# Altium PCB PCB_onduleur.PcbDoc
Units mil, origin at the board's own origin, x right, y up, seen from the top; angles counter-clockwise.
Board outline 4845 x 1010 mil, 2 copper layers (Top Layer, Bottom Layer); 14 components, 13 nets, 46 pads, 0 vias.
Unrouted connection lines stored in the file: 2.
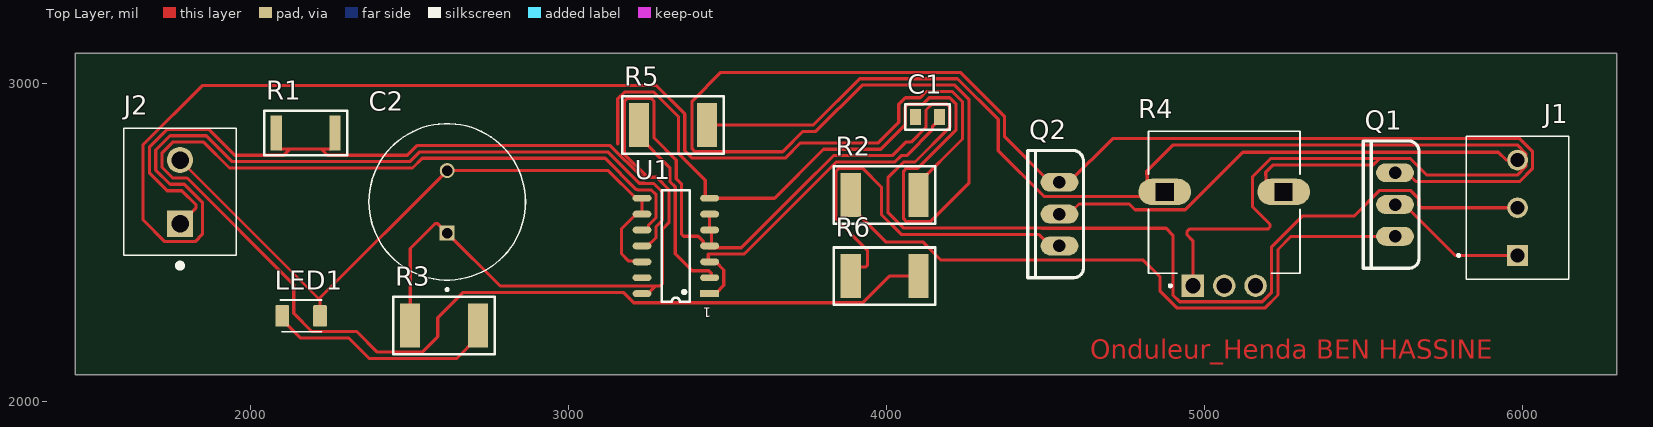
[diagram p0: Top Layer view]
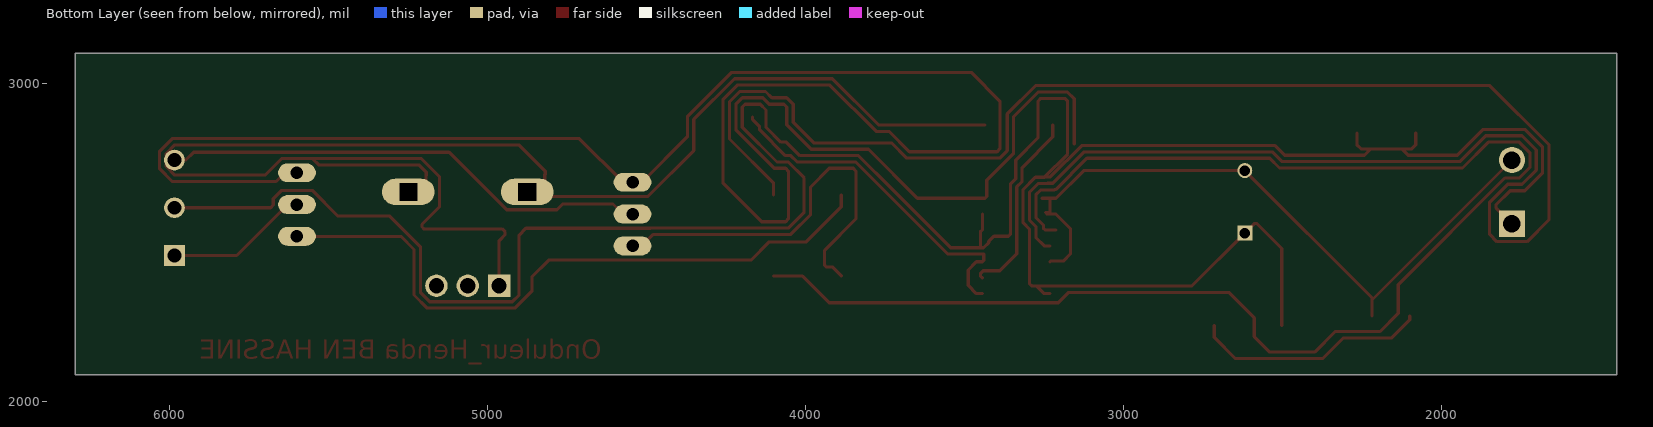
[diagram p1: Bottom Layer view, seen from below]
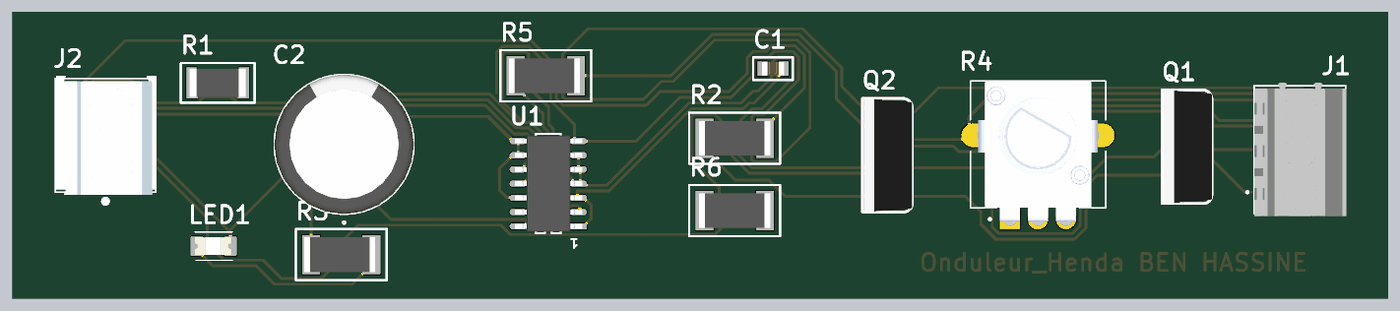
[diagram p2: 3D render of the assembled board from above, using the file's embedded part models]

## Layer stack, top to bottom
Top Solder: solder mask 0.4, Solder Resist, Dk 3.5
Top Layer: signal copper 1.4
Dielectric 1: dielectric 12.6, FR-4, Dk 4.8
Bottom Layer: signal copper 1.4
Bottom Solder: solder mask 0.4, Solder Resist, Dk 3.5

## Board outline
1450,2085 6295,2085 6295,3095 1450,3095

## Design rules (kind name [scope] priority, off if disabled: settings)
Clearance [All] p1: gap=10 ignorepadtopadclearanceinfootprint=FALSE except(0: Arc-Hole Track-Hole SMDPad-Hole THPad-Hole Via-Hole Fill-Hole Poly-Hole Region-Hole Text-Hole)
PolygonConnect [All] p1: connectstyle=Relief reliefconductorwidth=10 reliefentries=4 polygonreliefangle="90 Angle" airgapwidth=10
RoutingVias [All] p1: holewidth=28 width=50 viastyle="Through Hole" minholewidth=28 minwidth=50 maxholewidth=28 maxwidth=50
SolderMaskExpansion [All] p1: expansion=4 istentingtop=FALSE
Width [All] p1: maxlimit=10 minlimit=10 preferedwidth=10
30 further rules are at their usual default settings.

## Components (designator, comment, footprint, x,y, rotation, side; value= is the part's Value field where it differs from the comment)
C1 "Cap 10nF" "C0805 10nf" 4128.7,2895 r0 top
C2 "1000uf Cap" "Cap 1000uf" 2618.7,2628.43 r90 top
J1 "HDR 3" "HDR 3" 5983.7,2460 r90 top
J2 "HDR 2" "HDR 2" 1778.7,2560 r90 top
LED1 "LED SMD" LED 2159.25,2270 r180 top
Q1 "IRFZ44NPBF" IRF 5598.7,2620 r90 top
Q2 "IRFZ44NPBF" IRF 4543.7,2590 r90 top
R1 "Res 330 ohm" "R2010 330 ohm" 2173.7,2845 r180 top
R2 "Res 220 ohm" "R2512 220ohm" 3993.7,2650 r180 top
R3 "Res 1k ohm" "R2512 390k" 2608.7,2240 r180 top
R4 "100k POT" "100k POt" 5061.69,2512.36 r0 top
R5 "Res 390k ohm" "R2512 390k" 3328.7,2870 r180 top
R6 "Res 220 ohm" "R2512 220ohm" 3993.7,2395 r180 top
U1 "CD4047BM96" CD4047_SOP14 3443.7,2340 r180 top

## Footprints (in the part's own frame and the unit in brackets; to place one, negate y for a bottom-side part, rotate by r counter-clockwise, add the part's x,y. Pads: shape width x height; smd on the part's side, far side on the other; paste and mask are expansions set on the pad)
"100k POt" [mm]
  rect 1.8x1.8 hole 1.2: 1(-2.5,-3.75)
  round 1.8 hole 1.2: 2(0,-3.75) 3(2.5,-3.75)
  oval 4.2x2.1 hole 1.4 square: S1(-4.75,3.75) S2(4.75,3.75)
  silkscreen extent -6.05,-3.85 6.05,8.6, body extent -6.05,-3.96 6.05,8.54, height 26
"C0805 10nf" [mm]
  rect 0.9x1.3 smd: 1(-0.95,0) 2(0.95,0)
  silkscreen extent -1.78,-1.02 1.78,1.02, body extent -1,-0.63 1,0.63, height 1.4
"Cap 1000uf" [mm]
  round 1.2 hole 0.85: N(2.5,0)
  rect 1.2x1.2 hole 0.85: P(-2.5,0)
  silkscreen extent -7.1,-6.25 6.25,6.25, body extent -6.25,-6.25 6.25,6.25, height 25
CD4047_SOP14 [mm]
  rect 1.5x0.55 smd: 1(0,0)
  oval 1.5x0.55 smd: 2(0,-1.27) 3(0,-2.54) 4(0,-3.81) 5(0,-5.08) 6(0,-6.35) 7(0,-7.62) 8(5.4,-7.62) 9(5.4,-6.35) 10(5.4,-5.08) 11(5.4,-3.81) 12(5.4,-2.54) 13(5.4,-1.27) 14(5.4,0)
  silkscreen extent 1.58,-8.25 3.81,0.64, body extent -0.33,-8.14 5.67,0.52, height 1.75
"HDR 2" [mm]
  rect 2.1x2.1 hole 1.4: 1(0,0)
  round 2.1 hole 1.4: 2(5.08,0)
  silkscreen extent -3.55,-4.5 7.62,4.5, body extent -2.79,-4.57 7.87,4.43, height 15.2
"HDR 3" [mm]
  rect 1.65x1.65 hole 1.1: 1(0,0)
  round 1.65 hole 1.1: 2(3.81,0) 3(7.62,0)
  silkscreen extent -1.9,-4.1 9.52,4.8, body extent -2.15,-4.14 9.78,4.06, height 12.7
IRF [mm]
  oval 1.508x3.016 hole 1: 1(-2.54,0) 2(0,0) 3(2.54,0)
  silkscreen extent -5.08,-1.91 5.08,2.54, body extent -5.08,-1.91 5.08,2.4, height 15.37
LED [mm]
  rrect20% 1.1x1.73 smd: A(1.51,0) C(-1.51,0)
  silkscreen extent -1.65,-1.27 1.65,1.27, body extent -1.55,-0.8 1.65,0.8, height 1.1
"R2010 330 ohm" [mm]
  rect 0.9x2.8 smd: 1(-2.35,0) 2(2.35,0)
  silkscreen extent -3.3,-1.78 3.3,1.78, body extent -2.5,-1.25 2.5,1.25, height 0.7
"R2512 220ohm" [mm]
  rect 1.6x3.5 smd: 1(-2.7,0) 2(2.7,0)
  silkscreen extent -4.06,-2.29 4.06,2.29, body extent -3.17,-1.55 3.18,1.55, height 0.65
"R2512 390k" [mm]
  rect 1.6x3.5 smd: 1(-2.7,0) 2(2.7,0)
  silkscreen extent -4.06,-2.29 4.06,2.29, body extent -3.05,-1.55 3.3,1.55, height 0.65

## Part data
C1: "0805 330 nF 25 V -20 / +80 % Tolerance Y5V SMT Multilayer Ceramic Capacitor", Capacitance=330nF, Case Code (Imperial)=0805, Case Code (Metric)=2012, Dielectric=Y5V, Manufacturer="Kyocera AVX", Manufacturer Part Number=08053G334ZAT2A, Max Operating Temperature=85°C, Min Operating Temperature=-30°C, Package Quantity=1, Tolerance=80%, Voltage Rating=25V, Case/Package=0805, Category="Ceramic Capacitors", ComponentLink1Description=https://datasheet.ciiva.com/15212/getdatasheetpartid-200149-15212519.pdf?src-supplier=Verical, ComponentLink1URL=https://datasheet.ciiva.com/15212/getdatasheetpartid-200149-15212519.pdf?src-supplier=Verical, ComponentLink2Description=https://datasheet.ciiva.com/152/cy5v-152205.pdf?src-supplier=Digi-Key, ComponentLink2URL=https://datasheet.ciiva.com/152/cy5v-152205.pdf?src-supplier=Digi-Key, ComponentLink3Description=https://datasheet.ciiva.com/152/cy5v-152206.pdf?src-supplier=Digi-Key, ComponentLink3URL=https://datasheet.ciiva.com/152/cy5v-152206.pdf?src-supplier=Digi-Key, ComponentLink4Description=https://datasheet.ciiva.com/152/cy5v-152207.pdf?src-supplier=Digi-Key, ComponentLink4URL=https://datasheet.ciiva.com/152/cy5v-152207.pdf?src-supplier=Digi-Key, Construction=Flat, Contact Plating=Tin,Matte, Depth=1.25mm, Height=0.94mm, Lead Free="Lead Free", Length=0.079inch, Mount="Surface Mount", Number of Pins=2, Packaging="Tape and Reel", Pricing 1="1=0.33000, 10=0.22400, 50=0.14920, 100=0.12680, 500=0.08950, 1000=0.07831 (USD)", Radiation Hardening=No, REACH SVHC="No SVHC", RoHS=Yes, RoHS Compliant=Yes, Series=-, Stock 1=7037, Supplier 1=Digi-Key, Termination=SMD/SMT, Thickness=0.05inch, Voltage Rating (DC)=25V, Width=0.049inch
C2: "Cap Aluminum 1000uF 50V 20% (12.5 X 25mm) Radial 5mm 950mA 2000 hr 105°C Ammo Pack", Capacitance=1mF, Case/Package=Radial, Manufacturer=Panasonic, Manufacturer Part Number=EEU-HD1H102B, Max Operating Temperature=105°C, Min Operating Temperature=-55°C, Package Quantity=500, Ripple Current=950mA, Tolerance=20%, Voltage Rating=50V, Category="Aluminum Electrolytic Capacitors", ComponentLink1Description=https://datasheet.ciiva.com/30260/32aba0000ce137-30260380.pdf?src-supplier=Onlinecomponents.com, ComponentLink1URL=https://datasheet.ciiva.com/30260/32aba0000ce137-30260380.pdf?src-supplier=Onlinecomponents.com, ComponentLink2Description=https://datasheet.ciiva.com/24071/aba0000ce137-71750-24071852.pdf?src-supplier=Mouser, ComponentLink2URL=https://datasheet.ciiva.com/24071/aba0000ce137-71750-24071852.pdf?src-supplier=Mouser, Diameter=12.5mm, Features="General Purpose", Height - Seated (Max)=1.063inch, Lead Diameter=0.6mm, Lead Pitch=5mm, Lead/Base Style=Straight, Length=25mm, Life (Hours)=2000Hour, Mount="Through Hole", Packaging="Tape and Reel", Pricing 1="1=2.69000, 10=2.17900, 50=1.90140, 100=1.66370 (USD)", RoHS=Yes, Stock 1=1, Supplier 1=Digi-Key, Termination=Radial, Voltage Rating (DC)=50V
J1: "3 Position Wire to Board Terminal Block Horizontal with Board 0.150\" (3.81mm) Through Hole", Manufacturer="TE Connectivity", Manufacturer Part Number=284392-3, Category="Terminal Blocks", ComponentLink1Description=https://datasheet.ciiva.com/823/eng-cd-284392-b1-823460.pdf?src-supplier=Digi-Key, ComponentLink1URL=https://datasheet.ciiva.com/823/eng-cd-284392-b1-823460.pdf?src-supplier=Digi-Key, ComponentLink2Description=https://datasheet.ciiva.com/15169/getdatasheetpartid-47322-15169431.pdf?src-supplier=Verical, ComponentLink2URL=https://datasheet.ciiva.com/15169/getdatasheetpartid-47322-15169431.pdf?src-supplier=Verical, ComponentLink3Description=https://datasheet.ciiva.com/9370/eng-cs-1308389-eurostyle-terminal-blocks-0607-9370189.pdf?src-supplier=Avnet, ComponentLink3URL=https://datasheet.ciiva.com/9370/eng-cs-1308389-eurostyle-terminal-blocks-0607-9370189.pdf?src-supplier=Avnet, Pricing 1="1=0.49100, 10=0.49100, 25=0.49100, 50=0.49100, 100=0.49100 (USD)", RoHS=Yes, Stock 1=2108, Supplier 1=Newark
J2: "Conn Terminal Block 2 POS 5.08mm Solder ST Thru-Hole 17.5A/Contact", Manufacturer="TE Connectivity", Manufacturer Part Number=282841-2, Category="Terminal Blocks", ComponentLink1Description=https://datasheet.ciiva.com/11758/0900766b80e7dc90-11758676.pdf?src-supplier=RSComponents, ComponentLink1URL=https://datasheet.ciiva.com/11758/0900766b80e7dc90-11758676.pdf?src-supplier=RSComponents, ComponentLink2Description=https://datasheet.ciiva.com/15225/getdatasheetpartid-155859-15225932.pdf?src-supplier=Verical, ComponentLink2URL=https://datasheet.ciiva.com/15225/getdatasheetpartid-155859-15225932.pdf?src-supplier=Verical, ComponentLink3Description=https://datasheet.ciiva.com/30126/eng-cs-1308389-eurostyle-terminal-blocks-0607-30126654.pdf?src-supplier=Onlinecomponents.com, ComponentLink3URL=https://datasheet.ciiva.com/30126/eng-cs-1308389-eurostyle-terminal-blocks-0607-30126654.pdf?src-supplier=Onlinecomponents.com, ComponentLink4Description=https://datasheet.ciiva.com/823/eng-cd-282841-h6-823441.pdf?src-supplier=Digi-Key, ComponentLink4URL=https://datasheet.ciiva.com/823/eng-cd-282841-h6-823441.pdf?src-supplier=Digi-Key, Pricing 1="5=1.21300, 125=0.71100, 375=0.60700, 1000=0.51500, 2000=0.49400 (USD)", RoHS=Yes, Stock 1=155, Supplier 1=RSComponents
LED1: "LED RED CLEAR 1206 SMD", Case Code (Imperial)=1206, Case Code (Metric)=3216, Color=Red, Forward Current=30mA, Forward Voltage=2V, Lens Color=Colorless, Manufacturer="Vishay Lite-On", Manufacturer Part Number=LTST-C230KRKT, Max Operating Temperature=85°C, Min Operating Temperature=-55°C, Package Quantity=1, Power Dissipation=75mW, Reverse Voltage=5V, Test Current=20mA, Case/Package=1206, Category=LEDs, ComponentLink1Description=https://datasheet.ciiva.com/11774/0900766b80dc057b-11774044.pdf?src-supplier=RSComponents, ComponentLink1URL=https://datasheet.ciiva.com/11774/0900766b80dc057b-11774044.pdf?src-supplier=RSComponents, ComponentLink2Description=https://datasheet.ciiva.com/12400/lite-on-ltst-c230krkt-187437-12400814.pdf?src-supplier=Mouser, ComponentLink2URL=https://datasheet.ciiva.com/12400/lite-on-ltst-c230krkt-187437-12400814.pdf?src-supplier=Mouser, ComponentLink3Description=https://datasheet.ciiva.com/4266/dwonloadfilehandler-ashxtxtspecnods22-2000-253-ashxtxtspecnods22-2000-253-4266917.pdf?src-supplier=Arrow+Electronics, ComponentLink3URL=https://datasheet.ciiva.com/4266/dwonloadfilehandler-ashxtxtspecnods22-2000-253-ashxtxtspecnods22-2000-253-4266917.pdf?src-supplier=Arrow+Electronics, ComponentLink4Description=https://datasheet.ciiva.com/16444/ltst-c230krkt-16444734.pdf?src-supplier=Future+Electronics, ComponentLink4URL=https://datasheet.ciiva.com/16444/ltst-c230krkt-16444734.pdf?src-supplier=Future+Electronics, ComponentLink5Description=https://datasheet.ciiva.com/15117/getdatasheetpartid-144017-15117804.pdf?src-supplier=Verical, ComponentLink5URL=https://datasheet.ciiva.com/15117/getdatasheetpartid-144017-15117804.pdf?src-supplier=Verical, ComponentLink6Description=https://datasheet.ciiva.com/2110/s-110-ltst-c230krkt-2110049.pdf?src-supplier=Digi-Key, ComponentLink6URL=https://datasheet.ciiva.com/2110/s-110-ltst-c230krkt-2110049.pdf?src-supplier=Digi-Key, ComponentLink7Description=https://datasheet.ciiva.com/2110/s-110-ltst-c230krkt-2110048.pdf?src-supplier=Digi-Key, ComponentLink7URL=https://datasheet.ciiva.com/2110/s-110-ltst-c230krkt-2110048.pdf?src-supplier=Digi-Key, ComponentLink8Description=https://datasheet.ciiva.com/2110/s-110-ltst-c230krkt-2110050.pdf?src-supplier=Digi-Key, ComponentLink8URL=https://datasheet.ciiva.com/2110/s-110-ltst-c230krkt-2110050.pdf?src-supplier=Digi-Key, Depth=1.6mm, Dominant Wavelength=631nm, Height=1.1mm, Illumination Color=Red, Lead Free="Lead Free", Length=3.2mm, Lens Style=Diffused,Colorless,Rectangular,Clear, Lens Transparency=Clear, Luminous Intensity=54mcd, Mount="Surface Mount", Number of Elements=1, Number of LEDs=1, Number of Pins=2, Packaging="Tape and Reel", Power Rating=75mW, Pricing 1="1=0.31000, 10=0.16600, 100=0.07700, 500=0.07110, 1000=0.05570 (USD)", Radiation Hardening=No, RoHS=Yes, RoHS Compliant=Yes, Stock 1=672275, Supplier 1=Digi-Key, Viewing Angle=130°, Wavelength=639nm, Width=1.6mm
Q1 Q2: "N沟道 VDS=55V VGS=±20V ID=49A", Case/Package=TO-220, Continuous Drain Current (ID)=49A, Drain to Source Breakdown Voltage=55V, Drain to Source Resistance=17.5mR, Gate to Source Voltage (Vgs)=20V, Input Capacitance=1.47nF, Manufacturer=Infineon, Max Operating Temperature=175°C, Max Power Dissipation=94W, Min Operating Temperature=-55°C, Threshold Voltage=4V, Category=MOSFETs, ComponentLink1Description=https://www.alliedelec.com/m/d/ec90d67249a68ee89112b87fffe18402.pdf?src-supplier=Allied+Electronics, ComponentLink1URL=https://www.alliedelec.com/m/d/ec90d67249a68ee89112b87fffe18402.pdf?src-supplier=Allied+Electronics, ComponentLink2Description=http://www.farnell.com/datasheets/1916237.pdf?src-supplier=Element14, ComponentLink2URL=http://www.farnell.com/datasheets/1916237.pdf?src-supplier=Element14, ComponentLink3Description=https://www.infineon.com/dgdl/irfz44npbf.pdf?fileId=5546d462533600a40153563b3a9f220d&src-supplier=Digi-Key, ComponentLink3URL=https://www.infineon.com/dgdl/irfz44npbf.pdf?fileId=5546d462533600a40153563b3a9f220d&src-supplier=Digi-Key, Contact Plating=Tin,Matte, Drain to Source Voltage (Vdss)=55V, Element Configuration=Single, Halogen Free="Halogen Free", Height=0.65inch, Lead Free="Lead Free", Length=0.42inch, Manufacturer Part Number=IRFZ44NPBF, Max Dual Supply Voltage=55V, Mount="Through Hole", Number of Pins=3, Packaging=Rail/Tube, Power Dissipation=94W, Pricing 1="1=1.58000, 10=1.41400, 100=1.10210, 500=0.91040, 1000=0.79860 (USD)", Rds On Max=17.5mR, REACH SVHC="No SVHC", Rise Time=60ns, RoHS=Yes, RoHS Compliant=Yes, Stock 1=3296, Supplier 1=Digi-Key, Turn-Off Delay Time=44ns, Turn-On Delay Time=12ns, Width=0.19inch
R1: "Res Thick Film 2010 330 Ohm 1% 1W ±100ppm/°C Molded SMD SMD Paper T/R", Case Code (Imperial)=2010, Case Code (Metric)=5025, Manufacturer="Stackpole Electronics", Manufacturer Part Number=RMCP2010FT330R, Max Operating Temperature=155°C, Max Power Dissipation=1W, Min Operating Temperature=-55°C, Resistance=330R, Resistor Type="Thick Film", Temperature Coefficient=100ppm/°C, Tolerance=1%, Case/Package=2010, Category="Chip SMD Resistors", ComponentLink1Description=https://www.seielect.com/catalog/SEI-RMCF_RMCP.pdf?src-supplier=Avnet, ComponentLink1URL=https://www.seielect.com/catalog/SEI-RMCF_RMCP.pdf?src-supplier=Avnet, ComponentLink2Description=https://www.seielect.com/Catalog/SEI-RMCF_RMCP.pdf?src-supplier=Digi-Key, ComponentLink2URL=https://www.seielect.com/Catalog/SEI-RMCF_RMCP.pdf?src-supplier=Digi-Key, Height=0.028inch, Lead Free="Lead Free", Length=0.197inch, Number of Terminations=2, Packaging="Tape and Reel", Power Rating=1W, Pricing 1="1=0.52000, 10=0.39700, 100=0.16680, 1000=0.09200 (USD)", Radiation Hardening=No, RoHS=Yes, RoHS Compliant=Yes, Series=RMCP, Stock 1=4772, Supplier 1=Digi-Key, Width=0.098inch
R2 R6: "Res Thick Film 2512 220 Ohm 1% 1W ±100ppm/°C Pad SMD T/R", Case Code (Imperial)=2512, Case Code (Metric)=6432, Manufacturer=Yageo, Manufacturer Part Number=RC2512FK-07220RL, Max Operating Temperature=155°C, Max Power Dissipation=1W, Min Operating Temperature=-55°C, Resistance=220R, Resistance Tolerance=1%, Resistor Type="Thick Film", Temperature Coefficient=100ppm/°C, Voltage Rating=200V, Case/Package=2512, Category="Chip SMD Resistors", ComponentLink1Description=https://datasheet.ciiva.com/12561/pyu-rc2512-51-rohs-l-4-12561947.pdf?src-supplier=Mouser, ComponentLink1URL=https://datasheet.ciiva.com/12561/pyu-rc2512-51-rohs-l-4-12561947.pdf?src-supplier=Mouser, ComponentLink2Description=https://datasheet.ciiva.com/7671/638316-7671973.pdf?src-supplier=Element14, ComponentLink2URL=https://datasheet.ciiva.com/7671/638316-7671973.pdf?src-supplier=Element14, Construction=Rectangular, Contact Plating=Tin,Matte, Depth=3.1mm, Features="Moisture Resistant", Height=0.026inch, Length=6.35mm, Military Standard=Not, Number of Terminations=2, Packaging="Tape and Reel", Power Rating=1W, Pricing 1="1=0.47000, 10=0.33400, 100=0.13370, 1000=0.06588 (USD)", Radiation Hardening=No, REACH SVHC=Unknown, RoHS=Yes, RoHS Compliant=Yes, Series=RC, Stock 1=35, Supplier 1=Digi-Key, Termination=SMD/SMT, Tolerance=1%, Width=0.122inch
R3: "贴片电阻 1KΩ 1KΩ ±5% 1W 2512", Case Code (Imperial)=2512, Case Code (Metric)=6432, Manufacturer=Yageo, Manufacturer Part Number=RC2512JK-071KL, Max Operating Temperature=155°C, Max Power Dissipation=1W, Min Operating Temperature=-55°C, Resistance=1kR, Resistance Tolerance=5%, Resistor Type="Thick Film", Temperature Coefficient=100ppm/°C, Voltage Rating=200V, Case/Package=2512, Category="Chip SMD Resistors", ComponentLink1Description=https://datasheet.ciiva.com/5595/pyu-rc2512-51-rohs-l-4-5595927.pdf?src-supplier=Mouser, ComponentLink1URL=https://datasheet.ciiva.com/5595/pyu-rc2512-51-rohs-l-4-5595927.pdf?src-supplier=Mouser, ComponentLink2Description=https://datasheet.ciiva.com/7672/638316-7672039.pdf?src-supplier=Element14, ComponentLink2URL=https://datasheet.ciiva.com/7672/638316-7672039.pdf?src-supplier=Element14, ComponentLink3Description=https://datasheet.ciiva.com/7672/638316-7672038.pdf?src-supplier=Element14, ComponentLink3URL=https://datasheet.ciiva.com/7672/638316-7672038.pdf?src-supplier=Element14, Construction=Rectangular, Contact Plating=Tin,Lead, Depth=3.1mm, Features="Moisture Resistant", Height=0.026inch, Lead Free="Lead Free", Length=6.35mm, Military Standard=Not, Number of Terminations=2, Packaging="Tape and Reel", Power Rating=1W, Pricing 1="1=0.36000, 10=0.30100, 100=0.11750, 1000=0.04918 (USD)", REACH SVHC=Unknown, RoHS=Yes, RoHS Compliant=Yes, Series=RC, Stock 1=1409, Supplier 1=Digi-Key, Technology="THICK FILM", Termination=SMD/SMT, Tolerance=5%, Width=0.122inch, Working Voltage=200V
R4: "Res Conductive Plastic POT 100K Ohm 20% 0.05W(1/20W) 1(Elec)/1(Mech)Turn 6mm Pin Panel Mount/Through Hole", Manufacturer="TT BI", Manufacturer Part Number=P0915N-FC15BR100K, Max Operating Temperature=70°C, Max Power Dissipation=50mW, Min Operating Temperature=-10°C, Resistance=100kR, Resistor Type="Conductive Plastic", Tolerance=20%, Voltage Rating (AC)=50V, Actuator Diameter=0.236inch, Actuator Length=0.591inch, Category=Uncategorized, ComponentLink1Description=http://components.arrow.com/part/dataview/47585689S8708286N1290?src-supplier=Arrow+Electronics, ComponentLink1URL=http://components.arrow.com/part/dataview/47585689S8708286N1290?src-supplier=Arrow+Electronics, ComponentLink2Description=http://www.ttelectronics.com/sites/default/files/download-files/Datasheet_PanelPot_P09xSeries.pdf?src-supplier=Digi-Key, ComponentLink2URL=http://www.ttelectronics.com/sites/default/files/download-files/Datasheet_PanelPot_P09xSeries.pdf?src-supplier=Digi-Key, Mount=Panel, Number of Gangs=1, Number of Turns=1, Packaging=Tray, Power Rating=50mW, Pricing 1="1=2.23000, 10=1.96200, 25=1.75960, 40=1.69175, 80=1.62413, 230=1.55639, 440=1.28573, 1820=1.21806, 5460=1.01505 (USD)", RoHS=Yes, RoHS Compliant=Yes, Series=P09x, Stock 1=24101, Supplier 1=Digi-Key, Taper=Linear, Termination="PC Pins"
R5: "Res Thick Film 2512 390K Ohm 5% 1W ±200ppm/°C Molded SMD Embossed Carrier T/R", Case Code (Imperial)=2512, Case Code (Metric)=6432, Manufacturer=Panasonic, Manufacturer Part Number=ERJ-1TYJ394U, Max Operating Temperature=155°C, Max Power Dissipation=1W, Min Operating Temperature=-55°C, Package Quantity=4000, Resistance=390kR, Resistance Tolerance=5%, Resistor Type="Thick Film", Temperature Coefficient=200ppm/°C, Voltage Rating=200V, Voltage Rating (DC)=250V, Case/Package=2512, Category="Chip SMD Resistors", ComponentLink1Description=https://datasheet.ciiva.com/46379/1678796-46379782.pdf?src-supplier=Element14, ComponentLink1URL=https://datasheet.ciiva.com/46379/1678796-46379782.pdf?src-supplier=Element14, ComponentLink2Description=https://datasheet.ciiva.com/9182/aoa0000ce1-9182431.pdf?src-supplier=Avnet, ComponentLink2URL=https://datasheet.ciiva.com/9182/aoa0000ce1-9182431.pdf?src-supplier=Avnet, Contact Plating=Tin, Height=0.028inch, Lead Free="Contains Lead", Length=0.252inch, Mount="Surface Mount", Number of Terminations=2, Packaging="Tape and Reel", Power Rating=1W, Pricing 1="1=0.72000, 10=0.51500, 100=0.26780, 1000=0.14420 (USD)", REACH SVHC="No SVHC", RoHS=Yes, RoHS Compliant=Yes, Series=ERJ, Stock 1=6038, Supplier 1=Digi-Key, Termination=SMD/SMT, Tolerance=5%, Width=0.126inch
U1: "IC MONO/ASTBL MULTVIBRTR 14SOIC", Case/Package=SOIC, High Level Output Current=-4.2mA, Low Level Output Current=4.2mA, Manufacturer="Texas Instruments", Max Operating Temperature=125°C, Max Supply Current=20uA, Max Supply Voltage=18V, Min Operating Temperature=-55°C, Min Supply Voltage=3V, Operating Supply Voltage=12V, Output Current=6.8A, Package Quantity=2500, Category="Timers and Oscillators", ComponentLink1Description=https://datasheet.ciiva.com/41677/1830980-41677270.pdf?src-supplier=Newark, ComponentLink1URL=https://datasheet.ciiva.com/41677/1830980-41677270.pdf?src-supplier=Newark, ComponentLink2Description=https://datasheet.ciiva.com/14286/cd4047b-14286761.pdf?src-supplier=Avnet, ComponentLink2URL=https://datasheet.ciiva.com/14286/cd4047b-14286761.pdf?src-supplier=Avnet, Contact Plating=Gold, Height=1.58mm, Independent Circuits=1, Lead Free="Lead Free", Length=8.65mm, Logic Function=Multivibrator, Manufacturer Part Number=CD4047BM96, Mount="Surface Mount", Number of Bits=1, Number of Elements=1, Number of Pins=14, Packaging="Tape and Reel", Pricing 1="1=0.65000, 10=0.55300, 25=0.51560, 100=0.41260, 250=0.38308, 500=0.32414, 1000=0.25048 (USD)", Propagation Delay=125ns, Quiescent Current=20uA, Radiation Hardening=No, REACH SVHC="No SVHC", RoHS=Yes, RoHS Compliant=Yes, Schmitt Trigger Input=No, Series=4000B, Stock 1=1690, Supplier 1=Digi-Key, Technology=CMOS, Turn-On Delay Time=300ns, Weight=0.004564oz, Width=3.91mm

## Nets (pads, with @x,y where several pads share a name; then routed paths per layer and width w, separated by ;. In a path a pad name is that pad's centre, name@x,y a point inside that pad or via, vN(x,y) a via of type N, cw(c..) or ccw(c..) an arc to the next point about the centre after c; other vN are vias at no path point)
+12: C2.P J1.2 J2.1 R1.1 R1.2 R3.2 U1.4 U1.5 U1.6 U1.14 | length 8705.6
  Top Layer w10: J2.1 1829.18,2610.48 1829.18,2618.77 1784.28,2663.66 1738.8,2663.66 1682.36,2720.1 1682.36,2799.9 1738.8,2856.34 1869.51,2856.34 1950.97,2774.88 2105.11,2774.88 2125.11,2794.88 ; R1.2 2081.18,2807.6 2093.9,2794.88 2125.11,2794.88 ; R1.1 2266.22,2807.6 2253.5,2794.88 2222.29,2794.88 ; R3.2 2502.4,2481.99 2580.42,2560 2588.7,2560 C2.P 2784.53,2364.17 3260.5,2364.17 3273.98,2364.17 ; U1.14 3249.8,2340 3273.98,2364.17 ; 3247.51,2707.11 3230.15,2707.11 3131.78,2805.47 2523.53,2805.47 2492.94,2774.88 2242.29,2774.88 2222.29,2794.88 ; U1.6 U1.5 3444.62,2540 3450,2534.62 U1.4@3450,2484.17 ; J1.2@5963.03,2610 5681.58,2610 5673.07,2618.51 5673.07,2638.51 5646.89,2664.69 5550.51,2664.69 5469.48,2583.66 5307.09,2583.66 5210.55,2487.12 5210.55,2343.83 5181.01,2314.29 4921.62,2314.29 4900.18,2335.73 4900.18,2523.88 4878.75,2545.31 4486.98,2545.31 4486.2,2546.1 4054.01,2546.1 4004.09,2596.01 4004.09,2703.99 4054.01,2753.9 4089.52,2753.9 4198.82,2863.2 4198.82,2926.8 4190.03,2935.59 4142.17,2935.59 4124.02,2917.43 4124.02,2863.2 4077.3,2816.48 4060.02,2816.48 4017.44,2773.9 3833.12,2773.9 3729.23,2670 3543.4,2484.17 U1.4@3450,2484.17 ; 2125.11,2794.88 2222.29,2794.88 ; 3273.98,2364.17 3288.79,2364.17 3295.63,2371.02 3295.63,2542.73 3315.63,2562.73 3315.63,2617.27 3315.63,2667.27 3277.07,2705.83 3248.79,2705.83 3175.91,2778.71 3175.91,2945.11 3184.69,2953.9 3260.11,2953.9 3268.9,2945.11 3268.9,2829.64 3338.8,2759.74 3338.8,2700.66 3355.63,2683.83 3355.63,2526.42 3361.49,2520.56 3407.46,2520.56 3423.75,2504.27 3423.75,2500.47 3440.05,2484.17 U1.4@3450,2484.17
GND: C2.N J2.2 LED1.C Q1.3 Q2.3 U1.7 U1.8 U1.9 U1.12 | length 9403.7
  Top Layer w10: J2.2 2218.7,2320 ; LED1.C 2218.7,2320 ; 3155.27,2810.27 3155,2810.54 3155,2952.49 3176.41,2973.9 3268.4,2973.9 3345.58,2896.71 3345.58,2781.24 3430,2696.83 3430,2645.38 3435.38,2640 U1.7 3647.98,2640 3801.88,2793.9 3982.07,2793.9 4058.58,2870.41 4058.58,2926.8 4067.37,2935.59 4113.89,2935.59 4133.89,2955.59 4198.32,2955.59 4218.82,2935.09 4218.82,2854.91 4097.8,2733.9 4062.29,2733.9 4053.5,2725.11 4053.5,2574.89 4062.29,2566.1 4137.71,2566.1 4258.82,2687.21 4258.82,2951.66 4214.88,2995.59 3923.41,2995.59 3777.82,2850 3737.21,2850 3673.31,2786.1 3397.29,2786.1 3388.5,2794.89 3388.5,2945.11 3478.98,3035.59 4231.45,3035.59 4371.05,2895.99 4371.05,2832.96 4514.02,2690 Q2.3 4573.39,2690 4710.87,2827.48 5990.98,2827.48 6030.51,2787.95 6030.51,2732.05 5990.98,2692.52 5664.1,2692.52 5636.62,2720 Q1.3 ; U1.12 3228.87,2442.23 3189.49,2442.23 3166.57,2465.14 3166.57,2544.17 3212.4,2590 U1.9 3240,2590 3245,2595 3231.49,2595 3231.1,2595.38 U1.8 ; U1.8@3255.63,2640 U1.8 ; 2218.7,2320 2218.7,2326.85 C2.N 3125.55,2726.85 3212.4,2640 U1.8
NetC1_1: C1.1 R4.3
NetC1_2: C1.2 U1.1 U1.3 | length 1100.3
  Top Layer w10: U1.1 3462.4,2340 3488.23,2365.83 3488.23,2414.17 3462.4,2440 U1.3 3439.53,2444.17 3439.53,2464.17 3551.68,2464.17 3841.41,2753.9 4025.72,2753.9 4045.72,2773.9 4063,2773.9 4144.02,2854.91 4144.02,2865.04 4166.1,2887.13 C1.2
NetJ1_1: J1.1 Q1.2 | length 430.6
  Top Layer w10: Q1.2 5628.39,2620 5788.39,2460 J1.1@5963.03,2460
NetJ1_3: J1.3 Q2.2 | length 1525.1
  Top Layer w10: Q2.2 4573.39,2590 4604.98,2621.6 4763.2,2621.6 4781.14,2603.66 4939.36,2603.66 5120.38,2784.69 5923.47,2784.69 5948.16,2760 J1.3@5963.03,2760
NetLED1_A: LED1.A R3.1 | length 742.9
  Top Layer w10: LED1.A 2099.8,2257.6 2156.46,2200.94 2308.51,2200.94 2373.35,2136.1 2648.5,2136.1 2715,2202.6 R3.1
NetQ1_1: Q1.1 R2.2 | length 2084.2
  Top Layer w10: R2.2 3887.4,2612.6 3997.34,2502.66 4113.95,2502.66 4171.29,2445.31 4807.03,2445.31 4860.18,2392.16 4860.18,2347.44 4913.34,2294.29 5189.29,2294.29 5230.55,2335.55 5230.55,2478.84 5271.72,2520 Q1.1
NetQ2_1: Q2.1 R6.2 | length 1263
  Top Layer w10: R6.2 3887.4,2396.79 3913.9,2423.28 3933.9,2423.28 3939.76,2429.14 3939.76,2476.04 3840.91,2574.89 3840.91,2670 3840.91,2725.11 3849.69,2733.9 3925.11,2733.9 3984.09,2674.91 3984.09,2587.73 4045.72,2526.1 4477.91,2526.1 4514.02,2490 Q2.1
NetR2_1: R2.1 U1.11 | length 6029.3
  Top Layer w10: U1.11 3249.17,2490 3275.63,2516.46 3275.63,2551.02 3295.63,2571.02 3295.63,2608.98 3295.63,2658.98 3268.78,2685.83 3240.5,2685.83 3239.22,2687.11 3221.86,2687.11 3123.5,2785.47 2531.82,2785.47 2501.23,2754.88 1942.68,2754.88 1861.23,2836.34 1747.08,2836.34 1702.36,2791.62 1702.36,2728.38 1747.08,2683.66 1792.57,2683.66 1849.18,2627.05 1849.18,2526.59 1826.25,2503.66 1731.15,2503.66 1662.36,2572.45 1662.36,2808.19 1848.07,2993.9 3276.68,2993.9 3365.58,2904.99 3365.58,2789.53 3389.01,2766.1 3681.6,2766.1 3729.39,2813.9 3973.79,2813.9 4038.58,2878.69 4038.58,2935.09 4059.09,2955.59 4105.6,2955.59 4125.6,2975.59 4206.6,2975.59 4238.82,2943.37 4238.82,2826.22 4100,2687.4 R2.1
NetR4_1: R4.1 R4.S1 R4.S2 R5.1 | length 5029.1
  Top Layer w10: R5.1 3769.54,2870 3915.13,3015.59 4223.17,3015.59 4351.05,2887.71 4351.05,2789.77 4495.51,2645.31 R4.S1@4799,2645.31 ; R4.S1 4853.01,2660 4819.44,2693.57 4819.44,2713.53 4818.32,2714.65 4818.32,2724.65 4901.15,2807.48 5982.7,2807.48 6010.51,2779.67 6010.51,2740.33 5982.7,2712.52 5699.06,2712.52 5646.89,2764.69 5550.51,2764.69 ; R4.1 4963.27,2506.73 4944.14,2525.86 4944.14,2534.14 4953.66,2543.66 5199.77,2543.66 5205.63,2549.52 5205.63,2557.8 5151.02,2612.41 5151.02,2708.28 5207.42,2764.69 5550.51,2764.69 ; R4.S2 5227.03,2660 5193.46,2693.57 5193.46,2710.25 5192.36,2711.34 5192.36,2721.34 5215.71,2744.69 5530.51,2744.69 5550.51,2764.69
NetR5_2: R5.2 U1.2 | length 608.1
  Top Layer w10: R5.2 3222.4,2832.6 3318.8,2736.2 3318.8,2692.38 3335.63,2675.55 3335.63,2465.01 3388.7,2411.94 3441.05,2411.94 3450,2403 3450,2395.38 3444.62,2390 U1.2
NetR6_1: R6.1 U1.10 | length 4696.1
  Top Layer w10: U1.10@3212.4,2540 U1.10 3246.65,2540 3252.03,2545.38 3252.03,2555.71 3275.63,2579.3 3275.63,2600.7 3275.63,2650.7 3260.5,2665.83 3217.71,2665.83 3216.43,2667.11 3213.58,2667.11 3115.21,2765.47 2540.1,2765.47 2509.51,2734.88 1934.4,2734.88 1852.94,2816.34 1755.36,2816.34 1722.36,2783.34 1722.36,2736.66 1755.36,2703.66 1800.85,2703.66 2136.46,2368.06 2136.46,2277.86 2193.37,2220.94 2334.32,2220.94 2399.16,2156.1 2540.11,2156.1 2588.7,2204.69 2588.7,2263.59 2669.01,2343.9 3171.98,2343.9 3204.77,2311.1 3925.11,2311.1 4009.01,2395 R6.1
pads on no net: R4.2 U1.13

## Other copper
Top Layer:
  text "Onduleur_Henda BEN HASSINE" at 4640,2135 h60

## Text inside footprints (layer, text, board x,y; h text height)
U1: Top Overlay "1" at 3448.7,2295 h30 r180